# Altium PCB PCB.PcbDoc
Units mm, origin at the board's own origin, x right, y up, seen from the top; angles counter-clockwise.
Board outline 152.4 x 101.6 mm, 2 copper layers (Top Layer, Bottom Layer); 35 components, 28 nets, 111 pads, 3 vias.
Unrouted connection lines stored in the file: 44.
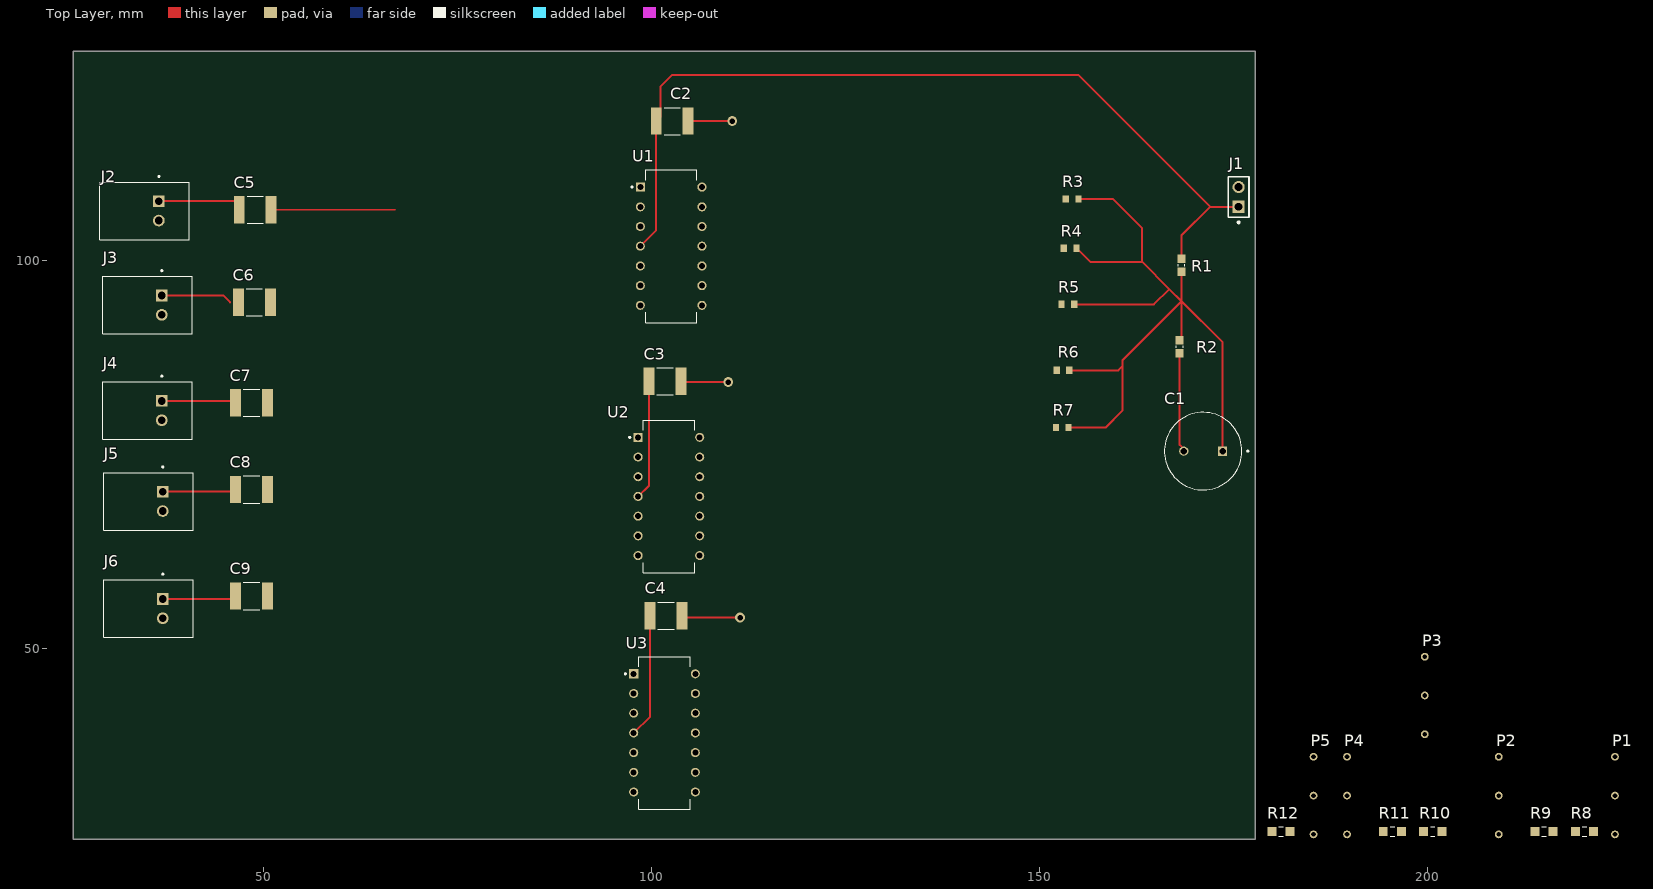
[diagram p0: Top Layer view]
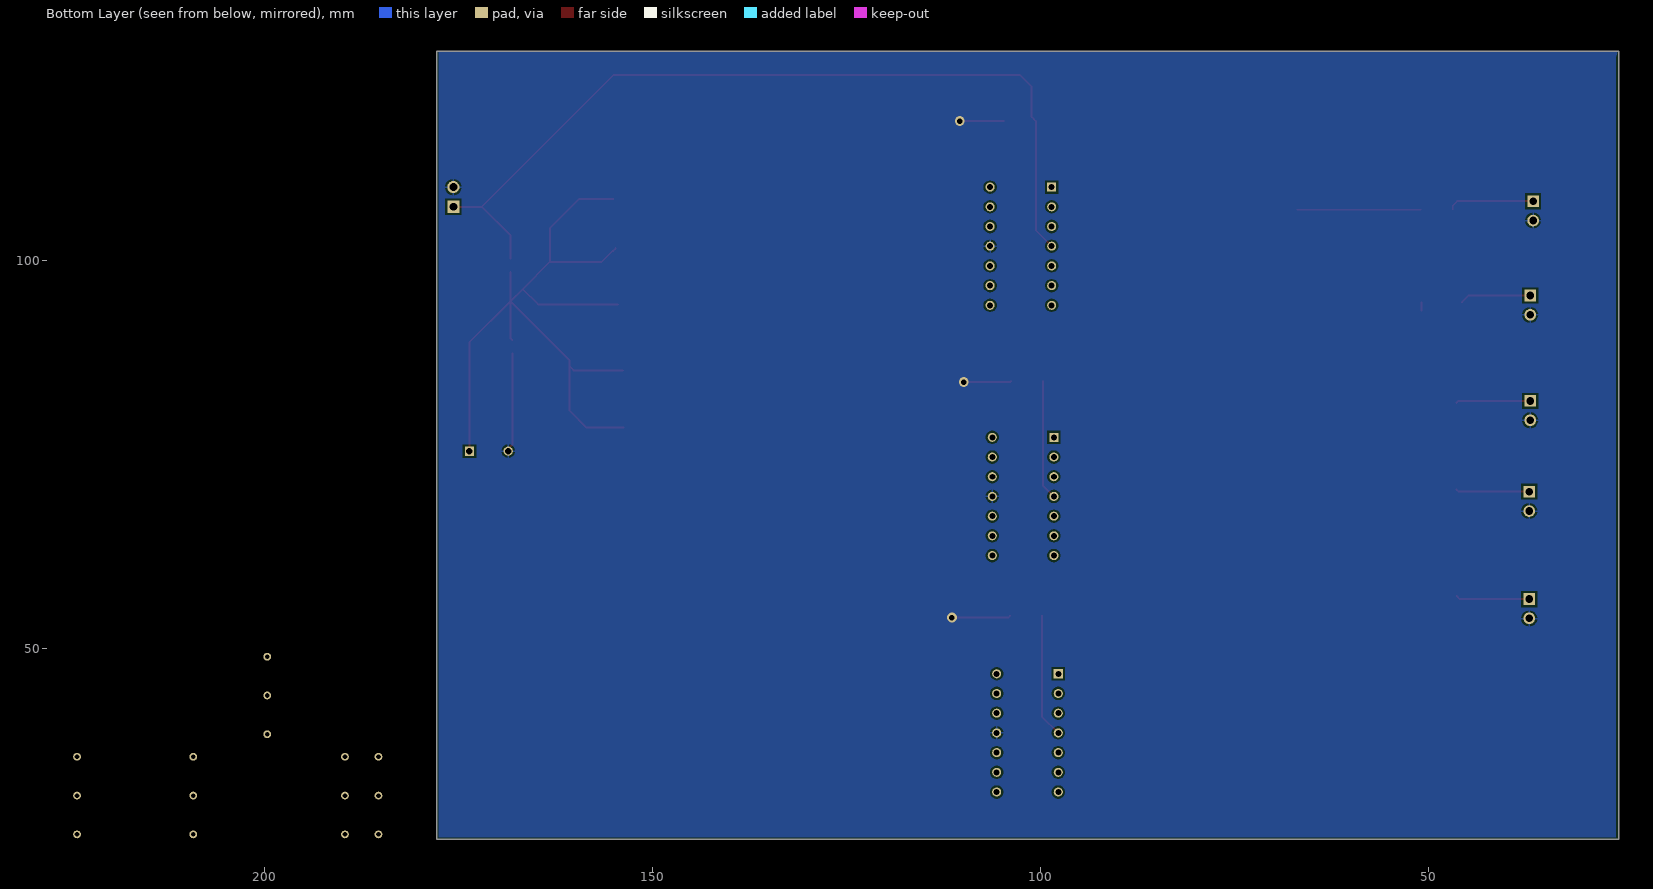
[diagram p1: Bottom Layer view, seen from below]

## Layer stack, top to bottom
Top Solder: solder mask 0.0102, Solder Resist, Dk 3.5
Top Layer: signal copper 0.0356
Dielectric 1: dielectric 0.32, FR-4, Dk 4.8
Bottom Layer: signal copper 0.0356
Bottom Solder: solder mask 0.0102, Solder Resist, Dk 3.5

## Board outline
25.4,25.4 177.8,25.4 177.8,127 25.4,127

## Design rules (kind name [scope] priority, off if disabled: settings)
Clearance [All] p1: gap=0.254 ignorepadtopadclearanceinfootprint=FALSE
PolygonConnect [All] p1: connectstyle=Relief reliefconductorwidth=0.254 reliefentries=4 polygonreliefangle="90 Angle" airgapwidth=0.254
RoutingVias [All] p1: holewidth=0.711 width=1.27 viastyle="Through Hole" minholewidth=0.711 minwidth=1.27 maxholewidth=0.711 maxwidth=1.27
SolderMaskExpansion [All] p1: expansion=0.102 istentingtop=FALSE
SupplyNets "Schematic Supply Nets_3" [InNet('Power+')] p1: voltage=0.000
SupplyNets "Schematic Supply Nets_2" [InNet('Power -')] p2: voltage=0.000
Width [All] p1: maxlimit=0.254 minlimit=0.254 preferedwidth=0.254
30 further rules are at their usual default settings.

## Components (designator, comment, footprint, x,y, rotation, side; value= is the part's Value field where it differs from the comment)
C1 "1u" CAPPRD500W60D1000H2000 171.069,75.438 r180 top
C2 "100N" CAPC4532X140N 102.616,117.983 r180 top
C3 "100N" CAPC4532X140N 101.702,84.455 r180 top
C4 "100N" CAPC4532X140N 101.829,54.229 r180 top
C5 "100n" CAPC4532X140N 48.87,106.553 r0 top
C6 "100n" CAPC4532X140N 48.768,94.615 r0 top
C7 "100n" CAPC4532X140N 48.387,81.661 r0 top
C8 "100n" CAPC4532X140N 48.387,70.485 r0 top
C9 "100n" CAPC4532X140N 48.387,56.769 r0 top
J1 "TSW-102-12-T-S" FP-TSW-102-12-T-S-MFG 175.641,108.204 r90 top
J2 "S2B-XH-A-1(LF)(SN)" JST_S2B-XH-A-1(LF)(SN) 36.449,106.406 r270 top
J3 "S2B-XH-A-1(LF)(SN)" JST_S2B-XH-A-1(LF)(SN) 36.83,94.254 r270 top
J4 "S2B-XH-A-1(LF)(SN)" JST_S2B-XH-A-1(LF)(SN) 36.83,80.665 r270 top
J5 "S2B-XH-A-1(LF)(SN)" JST_S2B-XH-A-1(LF)(SN) 36.957,68.961 r270 top
J6 "S2B-XH-A-1(LF)(SN)" JST_S2B-XH-A-1(LF)(SN) 36.957,55.138 r270 top
P1 "10K" 16PMI-10K 224.155,26.035 r90 top
P2 "10K" 16PMI-10K 209.169,26.035 r90 top
P3 "10K" 16PMI-10K 199.644,38.942 r90 top
P4 "10K" 16PMI-10K 189.611,26.035 r90 top
P5 "10K" 16PMI-10K 185.293,26.035 r90 top
R1 "10K" RESC1608X55 168.275,99.402 r270 top
R2 "10K" RESC1608X55 168.021,88.9 r270 top
R3 "1MEG" RESC1608X60N 154.178,107.95 r0 top
R4 "1MEG" RESC1608X60N 153.924,101.6 r0 top
R5 "1MEG" RESC1608X60N 153.622,94.361 r0 top
R6 "1MEG" RESC1608X60N 152.987,85.852 r0 top
R7 "1MEG" RESC1608X60N 152.908,78.486 r0 top
R8 "2K" RES_ERJP06F2001V 220.218,26.416 r0 top
R9 "2K" RES_ERJP06F2001V 215.011,26.416 r0 top
R10 "2K" RES_ERJP06F2001V 200.66,26.416 r0 top
R11 "2K" RES_ERJP06F2001V 195.453,26.416 r0 top
R12 "2K" RES_ERJP06F2001V 181.102,26.416 r0 top
U1 "TL074ACN" DIP794W45P254L1969H508Q14 102.489,101.854 r0 top
U2 "TL074ACN" DIP794W45P254L1969H508Q14 102.202,69.596 r0 top
U3 "TL074ACN" DIP794W45P254L1969H508Q14 101.633,39.116 r0 top

## Footprints (in the part's own frame and the unit in brackets; to place one, negate y for a bottom-side part, rotate by r counter-clockwise, add the part's x,y. Pads: shape width x height; smd on the part's side, far side on the other; paste and mask are expansions set on the pad)
16PMI-10K [mm]
  round 1 hole 0.6: 1(10,0) 2(5,0) 3(0,0)
CAPC4532X140N [mm]
  rect 1.4x3.51 smd paste+0 mask+0.102: 1(-2.057,0) 2(2.057,0)
  silkscreen extent -1.04,-1.75 1.04,1.75, body extent -2.25,-1.6 2.25,1.6, height 1.4
CAPPRD500W60D1000H2000 [mm]
  round 1.2 hole 0.85: N(2.5,0)
  rect 1.2x1.2 hole 0.85: P(-2.5,0)
  silkscreen extent -5.85,-5 5,5, body extent -5,-5 5,5, height 20
DIP794W45P254L1969H508Q14 [mm]
  rect 1.17x1.17 / inner round 1.17 / far side rect 1.17x1.17 hole 0.77 mask+0.102: 1(-3.97,7.62)
  round 1.17 hole 0.77 mask+0.102: 2(-3.97,5.08) 3(-3.97,2.54) 4(-3.97,0) 5(-3.97,-2.54) 6(-3.97,-5.08) 7(-3.97,-7.62) 8(3.97,-7.62) 9(3.97,-5.08) 10(3.97,-2.54) 11(3.97,0) 12(3.97,2.54) 13(3.97,5.08) 14(3.97,7.62)
  silkscreen extent -5.15,-9.84 3.3,9.84, body extent -4.14,-9.84 4.14,9.84, height 5.08
FP-TSW-102-12-T-S-MFG [mm]
  rect 1.57x1.57 hole 1.02 paste-2539.97 mask+0: 1(-1.27,0)
  round 1.57 hole 1.02 paste-2539.97 mask+0: 2(1.27,0)
  silkscreen extent -3.4,-1.34 2.61,1.34, body extent -2.71,-1.44 2.71,1.44, height 0.25
JST_S2B-XH-A-1(LF)(SN) [mm]
  rect 1.508x1.508 / inner round 1.508 / far side rect 1.508x1.508 hole 1: 1(-1.25,0)
  round 1.508 hole 1: 2(1.25,0)
  silkscreen extent -4.54,-7.6 3.7,3.9, body extent -3.7,-7.6 3.7,3.9, height 6.1
RES_ERJP06F2001V [mm]
  rect 1.15x1.15 smd: 1(-1.175,0) 2(1.175,0)
  silkscreen extent -0.28,-0.63 0.28,0.63
RESC1608X55 [mm]
  rect 1.1x1 smd: 1(-0.85,0) 2(0.85,0)
  silkscreen extent -0.15,-0.45 0.15,0.45
RESC1608X60N [mm]
  rect 0.81x0.93 smd: 1(-0.81,0) 2(0.81,0)
  body extent -0.8,-0.4 0.8,0.4, height 0.6

## Part data
C1: library part ECA2GHG100, "10ÂµF 400V Aluminum Electrolytic Capacitors Radial, Can 2000 Hrs @ 105Â°C", Package="RADIAL-2 Panasonic", Availability="Not in stock", Check_prices=https://www.snapeda.com/parts/ECA2GHG100/Panasonic/view-part/?ref=eda, MF=Panasonic, MP=ECA2GHG100, Price=None, SnapEDA_Link=https://www.snapeda.com/parts/ECA2GHG100/Panasonic/view-part/?ref=snap
C2 C3 C4 C5 C6 C7 C8 C9: library part C1812C104J1GACAUTO, "0.1 ÂµF Â±5% 100V Ceramic Capacitor C0G, NP0 1812 (4532 Metric)", Package="4532 KEMET", Check_prices=https://www.snapeda.com/parts/C1812C104J1GACAUTO/Kemet/view-part/?ref=eda, MF=KEMET, MP=C1812C104J1GACAUTO, SnapEDA_Link=https://www.snapeda.com/parts/C1812C104J1GACAUTO/Kemet/view-part/?ref=snap
J1: library part CMP-02766-001444-1, "CONN HEADER VERT 2POS 2.54MM", Contact Material=Bronze, Contact Plating=Tin, Gender=Male, Mount="Through Hole", Number of Contacts=2, Number of Rows=1, Packaging=Bulk, Pitch=2.54mm, Radiation Hardening=No, REACH SVHC="No SVHC", RoHS Compliant=Yes, Termination=Solder
J2 J3 J4 J5 J6: "Connector Header Through Hole, Right Angle 2 position 0.098 (2.50mm)", Package=None, Check_prices=https://www.snapeda.com/parts/S2B-XH-A-1(LF)(SN)/JST+Sales+America+Inc./view-part/?ref=eda, MF="JST Sales", MP=S2B-XH-A-1(LF)(SN), SnapEDA_Link=https://www.snapeda.com/parts/S2B-XH-A-1(LF)(SN)/JST+Sales+America+Inc./view-part/?ref=snap
P1 P2 P3 P4 P5: library part 16PMI-10K
R1 R2: library part WR06X1002FTL, Package=None, Availability=Unavailable, MF="{'manufacturer': u'Walsin Technology Corporation'}", MP=WR06X1002FTL, Price=None
R3 R4 R5 R6 R7: library part WR06X1004FTL, "RES, 1M, 1%, 75V, 0603, THICK FILM; Resistor Case Style:0603 [1608 Metric]; Resistance:1Mohm; Product Range:WR06 Series; Voltage Rating:75V; Resistor Element Material:Thick Film; Power Rating:100mW; Resistance Tolerance:Â± 1%; Temperature Coefficient:Â± 100ppm/Â°C; Automotive Qualification Standard:-; SVHC:Lead (15-Jan-2019)", Package="SMD-2 WALSIN", Check_prices=https://www.snapeda.com/parts/WR06X1004FTL/Techno/view-part/?ref=eda, MF="Walsin Technology Corp", MP=WR06X1004FTL, SnapEDA_Link=https://www.snapeda.com/parts/WR06X1004FTL/Techno/view-part/?ref=snap
R8 R9 R10 R11 R12: library part ERJP06F2001V, Package=None, Availability=Unavailable, MP=ERJP06F2001V, Price=None
U1 U2 U3: "Quad, 30-V, 3-MHz, high slew rate (13-V/Âµs), 6-mV offset voltage, In to V+, JFET-input op amp", Package="PDIP-14 Texas Instruments", Check_prices=https://www.snapeda.com/parts/TL074ACN/Texas+Instruments/view-part/?ref=eda, MF="Texas Instruments", MP=TL074ACN, SnapEDA_Link=https://www.snapeda.com/parts/TL074ACN/Texas+Instruments/view-part/?ref=snap

## Via types
v1: diameter 1.27, hole 0.711, Top Layer to Bottom Layer, 3 vias

## Nets (pads, with @x,y where several pads share a name; then routed paths per layer and width w, separated by ;. In a path a pad name is that pad's centre, name@x,y a point inside that pad or via, vN(x,y) a via of type N, cw(c..) or ccw(c..) an arc to the next point about the centre after c; other vN are vias at no path point)
AmpIn1: P1.3 R8.2 U1.6
AmpIn2: P2.3 R9.2 U1.13
AmpIn3: P3.3 R10.2 U2.6 U2.13
AmpIn4: P4.3 R11.2
AmpIn5: P5.3 R12.2 U3.6
AmpOut1: P1.2 U1.7
AmpOut2: P2.2 U1.14
AmpOut3: P3.2 U2.7
AmpOut4: P4.2 U2.14
AmpOut5: P5.2 U3.7
BIAS: C1.P R1.2 R2.1 R3.2 R4.2 R5.2 R6.2 R7.2 U1.5 U1.12 U2.5 U2.12 U3.5 U3.12 | length 106.1
  Top Layer w0.254: R7.2 158.496,78.486 160.655,80.645 160.655,86.36 ; R6.2 160.147,85.852 160.655,86.36 ; R5.2 164.719,94.361 166.688,96.329 ; R4.2 154.734,101.54 155.012,101.262 155.072,101.262 156.512,99.822 163.195,99.822 ; R3.2 159.385,107.95 163.195,104.14 163.195,99.822 ; R2.1 168.275,90.004 168.275,94.742 ; R1.2 168.275,94.742 ; C1.P 173.569,89.448 168.275,94.742 ; 160.655,86.36 160.655,87.122 168.275,94.742 ; 163.195,99.822 166.688,96.329 ; 166.688,96.329 168.275,94.742
Buffer_Feed1: R8.1 U1.1 U1.2
Buffer_Feed2: R9.1 U1.8 U1.9
Buffer_Feed3: R10.1 U2.1 U2.2
Buffer_Feed4: R11.1 U2.8 U2.9
Buffer_Feed5: R12.1 U3.1 U3.2
IN1: C5.1 J2.1 | length 11.1
  Top Layer w0.254: J2.1 46.24,107.656 46.813,107.083 C5.1
IN2: C6.1 J3.1 | length 9.2
  Top Layer w0.254: J3.1 44.741,95.504 45.63,94.615
IN3: C7.1 J4.1 | length 9.6
  Top Layer w0.254: J4.1 46.076,81.915 C7.1
IN4: C8.1 J5.1 | length 9.5
  Top Layer w0.254: J5.1 46.056,70.211 C8.1
IN5: C9.1 J6.1 | length 9.5
  Top Layer w0.254: J6.1 45.949,56.388 C9.1
NetC5_2: C5.2 R3.1 U1.3 | length 16
  Top Layer w0.254: C5.2 66.893,106.553
NetC6_2: C6.2 R4.1 U1.10 | length 1.1
  Top Layer w0.254: C6.2@50.825,93.56 C6.2
NetC7_2: C7.2 R5.1 U2.3
NetC8_2: C8.2 R6.1 U2.10
NetC9_2: C9.2 R7.1 U3.3
"Power -": C1.N C2.1 C3.1 C4.1 J1.2 J2.2 J3.2 J4.2 J5.2 J6.2 R2.2 U1.11 U2.11 U3.11 | length 32.3
  Top Layer w0.254: C3.1 103.886,84.328 v1(109.855,84.328) ; C4.1 104.14,53.975 v1(111.379,53.975) ; C2.1 v1(110.363,117.983) ; R2.2 168.021,76.242 168.569,75.694 C1.N
Power+: C2.2 C3.2 C4.2 J1.1 R1.1 U1.4 U2.4 U3.4 | length 143.5
  Top Layer w0.254: U3.4 99.772,41.225 C4.2 ; U2.4 99.645,71.009 C3.2 ; U1.4 100.559,103.894 C2.2 101.092,118.516 101.092,122.428 102.616,123.952 154.94,123.952 171.958,106.934 ; R1.1 168.275,103.251 171.958,106.934 ; J1.1 171.958,106.934
pads on no net: P1.1 P2.1 P3.1 P4.1 P5.1 U3.8 U3.9 U3.10 U3.13 U3.14

## Polygon pours and split planes (outlines as drawn)
"Power -" on Bottom Layer "POWER_-_L02_P005" (solid, pour order 5): 25.527,127 177.546,127 177.546,25.654 25.781,25.654 25.781,126.238